# Altium PCB PumpControl.PcbDoc
Units mm, origin at the board's own origin, x right, y up, seen from the top; angles counter-clockwise.
Board outline 52.07 x 92.61 mm, 2 copper layers (Top Layer, Bottom Layer); 86 components, 56 nets, 282 pads, 83 vias.
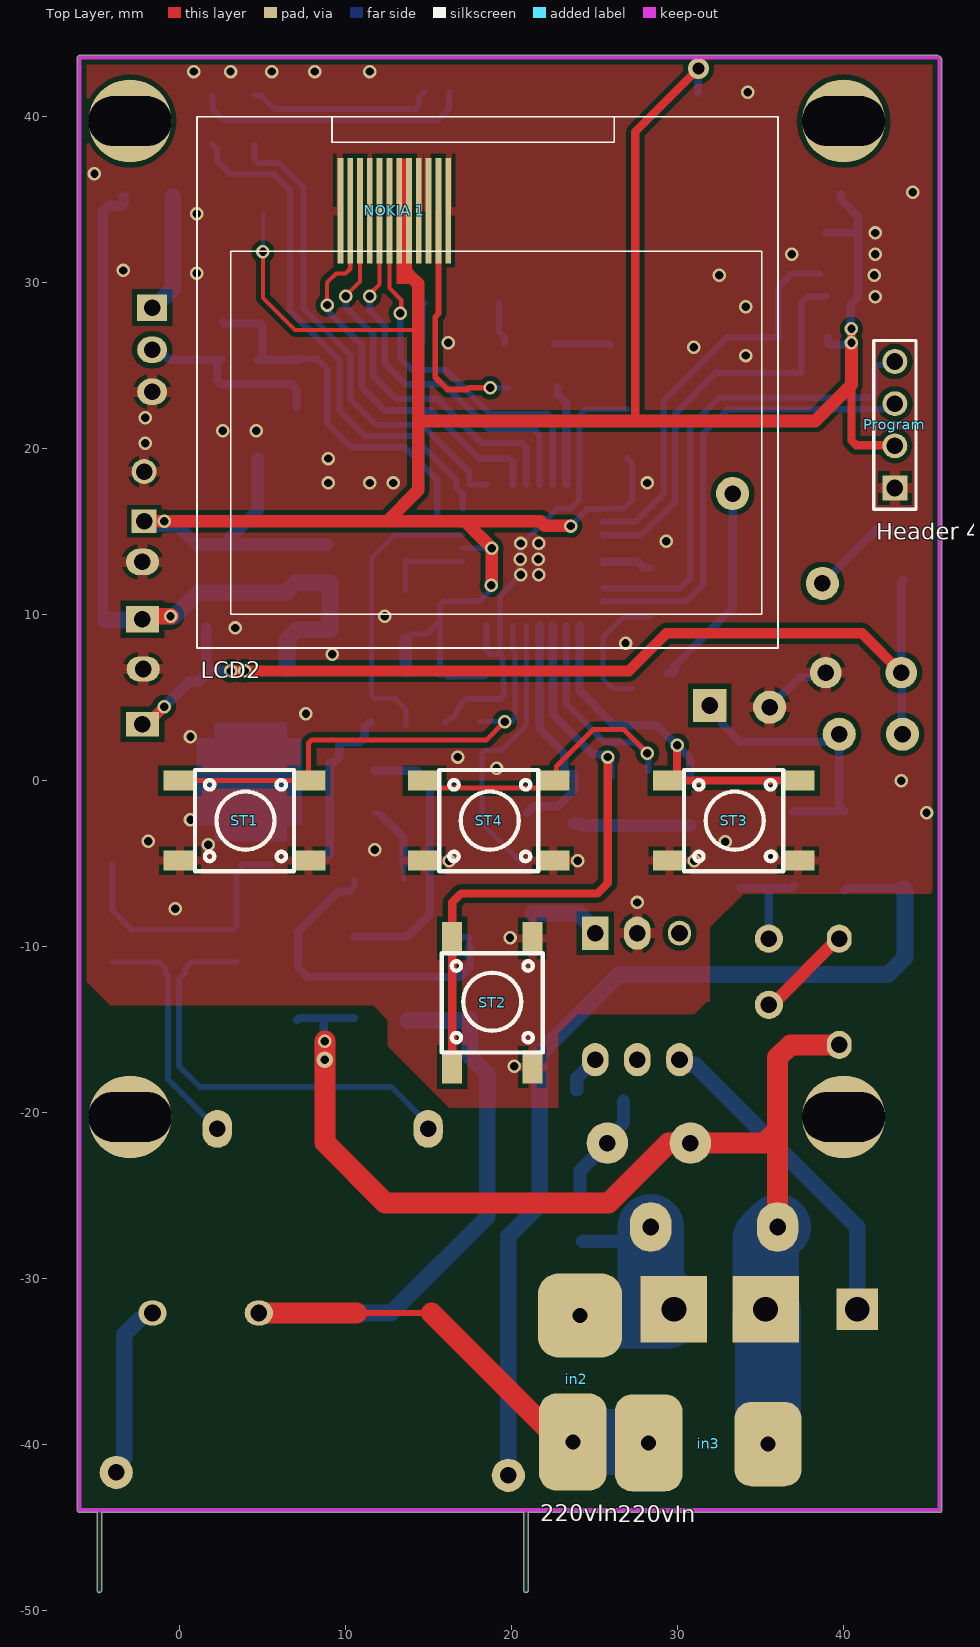
[diagram p0: Top Layer view]
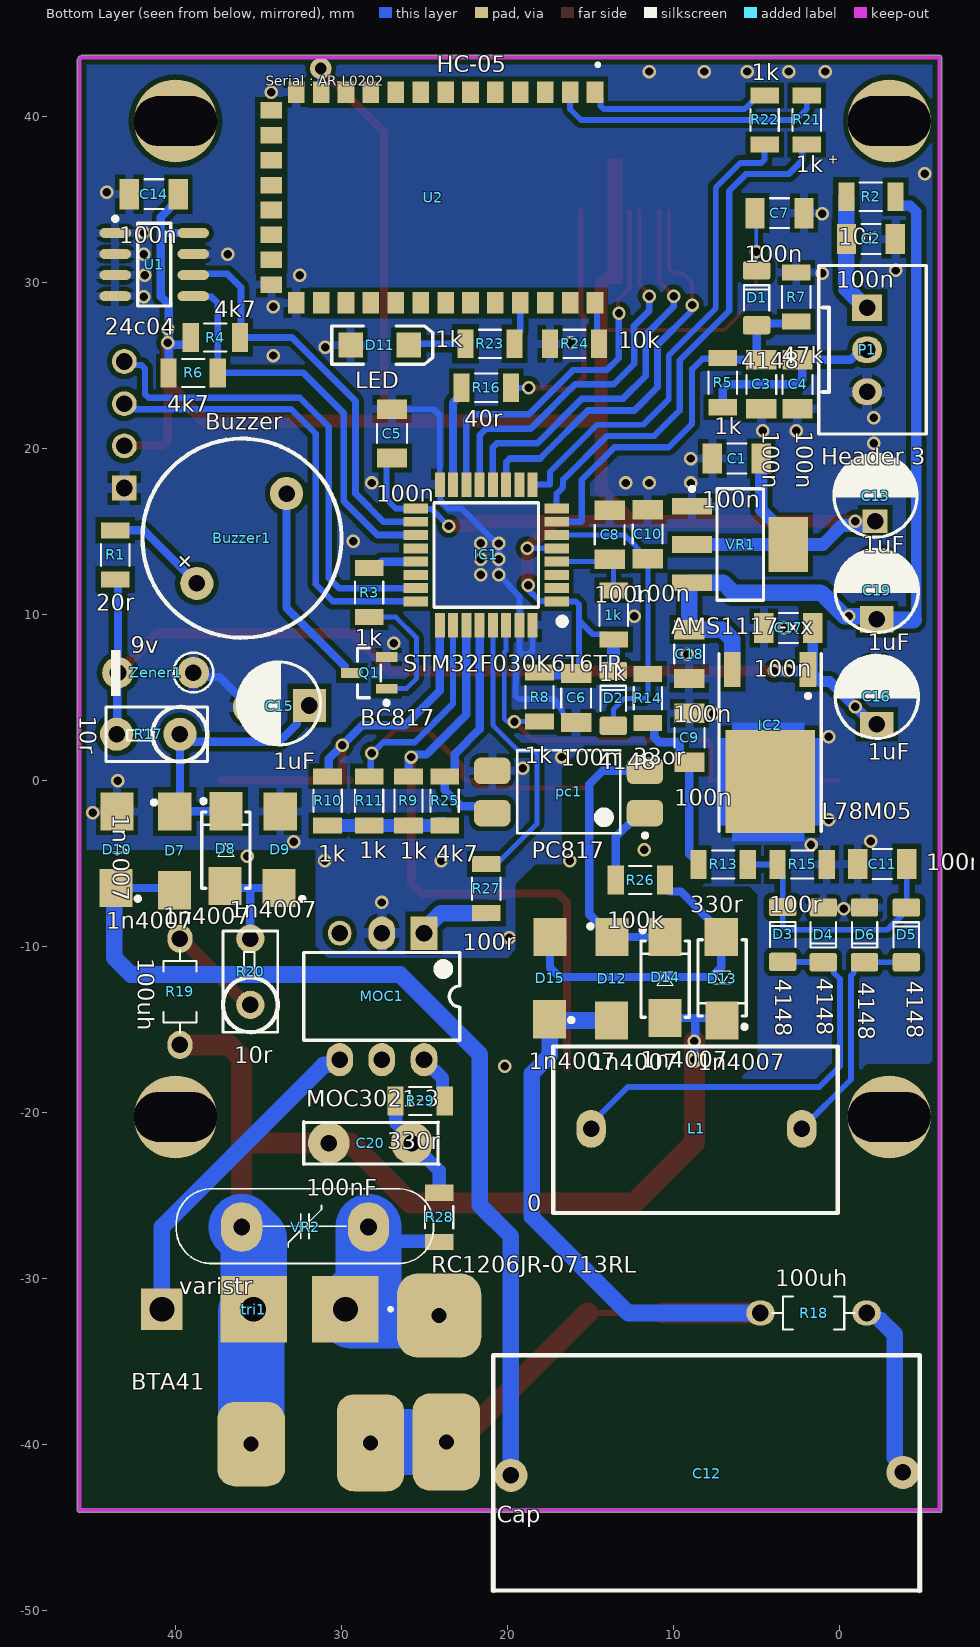
[diagram p1: Bottom Layer view, seen from below]
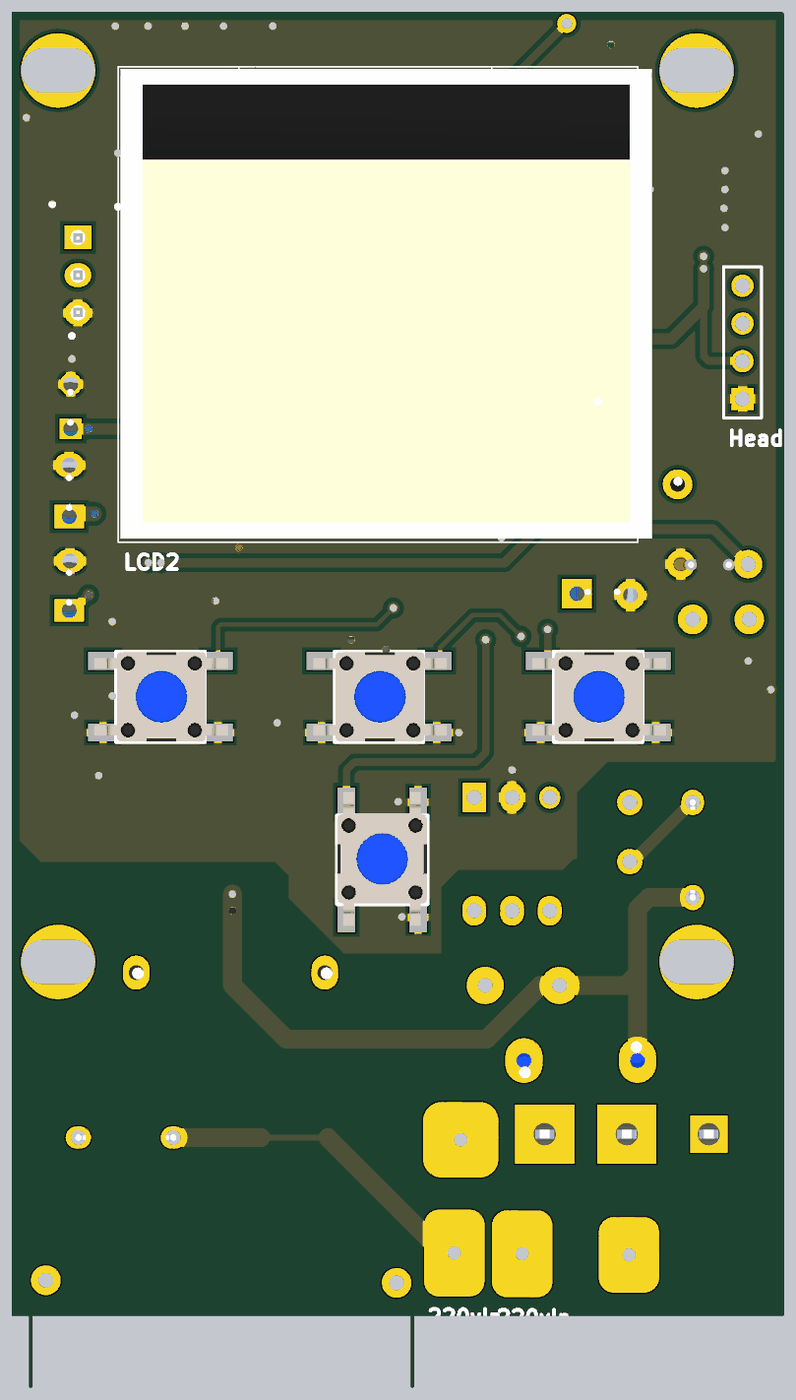
[diagram p2: 3D render of the assembled board from above, using the file's embedded part models]
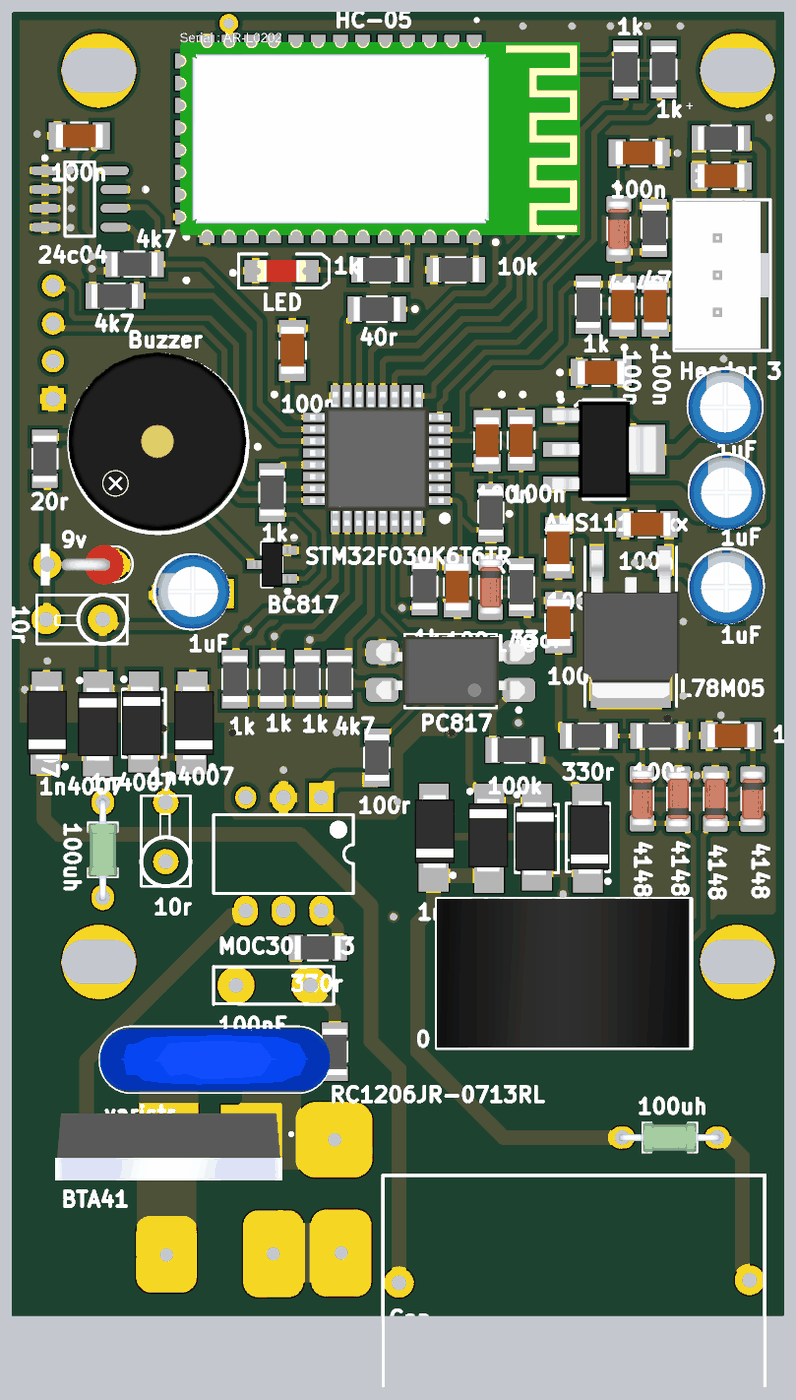
[diagram p3: 3D render of the assembled board from below, using the file's embedded part models]

## Layer stack, top to bottom
Top Solder: solder mask 0.0102, Solder Resist, Dk 3.5
Top Layer: signal copper 0.0356
Dielectric 1: dielectric 0.32, FR-4, Dk 4.8
Bottom Layer: signal copper 0.0356
Bottom Solder: solder mask 0.0102, Solder Resist, Dk 3.5

## Board outline
-4.953,-48.793 -4.953,-44.095 -6.02,-44.095 cw(c-6.02,-43.967) -6.147,-43.967 -6.147,43.561 cw(c-6.02,43.561) -6.02,43.688 45.695,43.688 45.785,43.651 45.886,43.549 45.924,43.459 45.924,-43.967 cw(c45.796,-43.967) 45.796,-44.095 21.006,-44.095 21.006,-48.793 cw(c20.879,-48.793) 20.751,-48.793 20.751,-44.095 -4.699,-44.095 -4.699,-48.793 cw(c-4.826,-48.793)

## Design rules (kind name [scope] priority, off if disabled: settings)
Clearance Clearance_19 [InNamedPolygon('NONET_L-01_P-001') Or InNamedPolygon('NONET_L-01_P-001')] p1: gap=0.305 ignorepadtopadclearanceinfootprint=TRUE
Clearance Clearance_18 [InNamedPolygon('Top Layer-No Net')] p2: gap=0.4 ignorepadtopadclearanceinfootprint=FALSE
Clearance Clearance_17 [InNamedPolygon('Top Layer-No Net')] p3: gap=0.254 ignorepadtopadclearanceinfootprint=FALSE except(0: Arc-Hole Track-Hole SMDPad-Hole THPad-Hole Via-Hole Fill-Hole Poly-Hole Region-Hole Text-Hole)
Clearance Clearance_16 [InNamedPolygon('Top Layer-No Net')] p4: gap=0.4 ignorepadtopadclearanceinfootprint=FALSE
Clearance Clearance_15 [InNamedPolygon('GND_L02_P008')] p5: gap=0.3 ignorepadtopadclearanceinfootprint=TRUE
Clearance Clearance_14 [InNamedPolygon('GND_L01_P006')] p6: gap=0.381 ignorepadtopadclearanceinfootprint=TRUE
Clearance Clearance_13 [InNamedPolygon('GND_L01_P006')] p7: gap=0.381 ignorepadtopadclearanceinfootprint=TRUE
Clearance Clearance_12 [InNamedPolygon('GND_L01_P006')] p8: gap=0.2 ignorepadtopadclearanceinfootprint=FALSE
Clearance Clearance_11 [InNamedPolygon('GND_L01_P006')] p9: gap=0.254 ignorepadtopadclearanceinfootprint=FALSE except(0: Arc-Hole Track-Hole SMDPad-Hole THPad-Hole Via-Hole Fill-Hole Poly-Hole Region-Hole Text-Hole)
Clearance Clearance_10 [InNamedPolygon('GND_L02_P008')] p10: gap=0.5 ignorepadtopadclearanceinfootprint=FALSE
Clearance Clearance_9 [InNamedPolygon('GND_L01_P006')] p11: gap=0.5 ignorepadtopadclearanceinfootprint=FALSE
Clearance Clearance_8 [InNamedPolygon('GND_L01_P006')] p12: gap=0.254 ignorepadtopadclearanceinfootprint=FALSE except(0: Arc-Hole Track-Hole SMDPad-Hole THPad-Hole Via-Hole Fill-Hole Poly-Hole Region-Hole Text-Hole)
Clearance Clearance_7 [InNamedPolygon('GND_L01_P006')] p13: gap=0.5 ignorepadtopadclearanceinfootprint=FALSE
Clearance Clearance_6 [InNamedPolygon('GND_L01_P006')] p14: gap=0.254 ignorepadtopadclearanceinfootprint=FALSE except(0: Arc-Hole Track-Hole SMDPad-Hole THPad-Hole Via-Hole Fill-Hole Poly-Hole Region-Hole Text-Hole)
Clearance 0 [InNamedPolygon('GND_L01_P006')] p15: gap=0.254 ignorepadtopadclearanceinfootprint=FALSE except(0: Arc-Hole Track-Hole SMDPad-Hole THPad-Hole Via-Hole Fill-Hole Poly-Hole Region-Hole Text-Hole)
Clearance Clearance_5 [InNamedPolygon('GND_L01_P006')] p16: gap=0.254 ignorepadtopadclearanceinfootprint=FALSE except(0: Arc-Hole Track-Hole SMDPad-Hole THPad-Hole Via-Hole Fill-Hole Poly-Hole Region-Hole Text-Hole)
Clearance Clearance_4 [InNamedPolygon('GND-E_L02_P002')] p17: gap=0.508 ignorepadtopadclearanceinfootprint=FALSE
Clearance Clearance_3 [InNamedPolygon('GND_L01_P001')] p18: gap=0.635 ignorepadtopadclearanceinfootprint=FALSE
Clearance Clearance_2 [InNamedPolygon('GND_L02_P000')] p19: gap=0.508 ignorepadtopadclearanceinfootprint=FALSE
Clearance Clearance_1 [InNamedPolygon('Bottom Layer-GND')] p20: gap=0.356 ignorepadtopadclearanceinfootprint=FALSE
Clearance [All] p21: gap=0.3 ignorepadtopadclearanceinfootprint=FALSE
PolygonConnect PolygonConnect_15 [All vs IsNamedPolygon('NONET_L-01_P-001') Or IsNamedPolygon('NONET_L-01_P-001')] p1: thpad.connectstyle=Relief thpad.reliefconductorwidth=0.635 thpad.reliefentries=4 thpad.polygonreliefangle="90 Angle" thpad.airgapwidth=0.254 smdpad.connectstyle=Relief smdpad.reliefconductorwidth=0.508 smdpad.reliefentries=4 smdpad.polygonreliefangle="90 Angle" smdpad.airgapwidth=0.254 via.connectstyle=Direct via.reliefconductorwidth=0.254 via.reliefentries=4 via.polygonreliefangle="90 Angle" via.airgapwidth=0.254
PolygonConnect PolygonConnect_14 [All vs IsNamedPolygon('GND_L02_P008')] p2: thpad.connectstyle=Relief thpad.reliefconductorwidth=0.762 thpad.reliefentries=4 thpad.polygonreliefangle="90 Angle" thpad.airgapwidth=0.3 smdpad.connectstyle=Relief smdpad.reliefconductorwidth=0.508 smdpad.reliefentries=4 smdpad.polygonreliefangle="90 Angle" smdpad.airgapwidth=0.3 via.connectstyle=Relief via.reliefconductorwidth=0.254 via.reliefentries=4 via.polygonreliefangle="90 Angle" via.airgapwidth=0.3
PolygonConnect PolygonConnect_13 [All vs IsNamedPolygon('GND_L01_P006')] p3: thpad.connectstyle=Relief thpad.reliefconductorwidth=0.889 thpad.reliefentries=4 thpad.polygonreliefangle="90 Angle" thpad.airgapwidth=0.254 smdpad.connectstyle=Relief smdpad.reliefconductorwidth=0.635 smdpad.reliefentries=4 smdpad.polygonreliefangle="90 Angle" smdpad.airgapwidth=0.254 via.connectstyle=Direct via.reliefconductorwidth=0.254 via.reliefentries=4 via.polygonreliefangle="90 Angle" via.airgapwidth=0.254
PolygonConnect PolygonConnect_12 [All vs IsNamedPolygon('GND_L01_P006')] p4: thpad.connectstyle=Relief thpad.reliefconductorwidth=0.889 thpad.reliefentries=4 thpad.polygonreliefangle="90 Angle" thpad.airgapwidth=0.254 smdpad.connectstyle=Relief smdpad.reliefconductorwidth=0.508 smdpad.reliefentries=4 smdpad.polygonreliefangle="90 Angle" smdpad.airgapwidth=0.254 via.connectstyle=Direct via.reliefconductorwidth=0.254 via.reliefentries=4 via.polygonreliefangle="90 Angle" via.airgapwidth=0.254
PolygonConnect PolygonConnect_11 [All vs IsNamedPolygon('GND_L01_P006')] p5: thpad.connectstyle=Relief thpad.reliefconductorwidth=0.508 thpad.reliefentries=4 thpad.polygonreliefangle="90 Angle" thpad.airgapwidth=0.254 smdpad.connectstyle=Relief smdpad.reliefconductorwidth=0.508 smdpad.reliefentries=4 smdpad.polygonreliefangle="90 Angle" smdpad.airgapwidth=0.254 via.connectstyle=Direct via.reliefconductorwidth=0.254 via.reliefentries=4 via.polygonreliefangle="90 Angle" via.airgapwidth=0.254
PolygonConnect PolygonConnect_10 [All vs IsNamedPolygon('GND_L01_P006')] p6: thpad.connectstyle=Relief thpad.reliefconductorwidth=0.254 thpad.reliefentries=4 thpad.polygonreliefangle="90 Angle" thpad.airgapwidth=0.254 smdpad.connectstyle=Relief smdpad.reliefconductorwidth=0.254 smdpad.reliefentries=4 smdpad.polygonreliefangle="90 Angle" smdpad.airgapwidth=0.254 via.connectstyle=Direct via.reliefconductorwidth=0.254 via.reliefentries=4 via.polygonreliefangle="90 Angle" via.airgapwidth=0.254
PolygonConnect PolygonConnect_9 [All vs IsNamedPolygon('GND_L01_P006')] p7: thpad.connectstyle=Direct thpad.reliefconductorwidth=0.254 thpad.reliefentries=4 thpad.polygonreliefangle="90 Angle" thpad.airgapwidth=0.254 smdpad.connectstyle=Relief smdpad.reliefconductorwidth=0.254 smdpad.reliefentries=4 smdpad.polygonreliefangle="90 Angle" smdpad.airgapwidth=0.254 via.connectstyle=Relief via.reliefconductorwidth=0.254 via.reliefentries=4 via.polygonreliefangle="90 Angle" via.airgapwidth=0.254
PolygonConnect PolygonConnect_8 [All vs IsNamedPolygon('GND_L01_P006')] p8: connectstyle=Relief reliefconductorwidth=0.254 reliefentries=4 polygonreliefangle="90 Angle" airgapwidth=0.254
PolygonConnect PolygonConnect_7 [All vs IsNamedPolygon('GND_L02_P008')] p9: connectstyle=Relief reliefconductorwidth=0.254 reliefentries=4 polygonreliefangle="90 Angle" airgapwidth=0.254
PolygonConnect PolygonConnect_6 [All vs IsNamedPolygon('GND_L02_P008')] p10: connectstyle=Direct reliefconductorwidth=0.254 reliefentries=4 polygonreliefangle="90 Angle" airgapwidth=0.254
PolygonConnect PolygonConnect_5 [All vs IsNamedPolygon('GND_L02_P008')] p11: thpad.connectstyle=Direct thpad.reliefconductorwidth=0.254 thpad.reliefentries=4 thpad.polygonreliefangle="90 Angle" thpad.airgapwidth=0.254 smdpad.connectstyle=Relief smdpad.reliefconductorwidth=0.254 smdpad.reliefentries=4 smdpad.polygonreliefangle="90 Angle" smdpad.airgapwidth=0.254 via.connectstyle=Relief via.reliefconductorwidth=0.254 via.reliefentries=4 via.polygonreliefangle="90 Angle" via.airgapwidth=0.254
PolygonConnect PolygonConnect_4 [All vs IsNamedPolygon('GND-E_L02_P002')] p12: thpad.connectstyle=Relief thpad.reliefconductorwidth=0.635 thpad.reliefentries=4 thpad.polygonreliefangle="90 Angle" thpad.airgapwidth=0.254 smdpad.connectstyle=Relief smdpad.reliefconductorwidth=0.381 smdpad.reliefentries=4 smdpad.polygonreliefangle="90 Angle" smdpad.airgapwidth=0.254 via.connectstyle=Direct via.reliefconductorwidth=0.254 via.reliefentries=4 via.polygonreliefangle="90 Angle" via.airgapwidth=0.254
PolygonConnect PolygonConnect_3 [All vs IsNamedPolygon('GND_L01_P001')] p13: thpad.connectstyle=Relief thpad.reliefconductorwidth=0.635 thpad.reliefentries=4 thpad.polygonreliefangle="90 Angle" thpad.airgapwidth=0.254 smdpad.connectstyle=Relief smdpad.reliefconductorwidth=0.635 smdpad.reliefentries=4 smdpad.polygonreliefangle="90 Angle" smdpad.airgapwidth=0.254 via.connectstyle=Direct via.reliefconductorwidth=0.254 via.reliefentries=4 via.polygonreliefangle="90 Angle" via.airgapwidth=0.254
PolygonConnect PolygonConnect_2 [All vs IsNamedPolygon('GND_L02_P000')] p14: thpad.connectstyle=Relief thpad.reliefconductorwidth=0.635 thpad.reliefentries=4 thpad.polygonreliefangle="90 Angle" thpad.airgapwidth=0.254 smdpad.connectstyle=Relief smdpad.reliefconductorwidth=0.254 smdpad.reliefentries=4 smdpad.polygonreliefangle="90 Angle" smdpad.airgapwidth=0.381 via.connectstyle=Direct via.reliefconductorwidth=0.254 via.reliefentries=4 via.polygonreliefangle="90 Angle" via.airgapwidth=0.254
PolygonConnect PolygonConnect_1 [All vs IsNamedPolygon('Bottom Layer-GND')] p15: thpad.connectstyle=Relief thpad.reliefconductorwidth=0.635 thpad.reliefentries=4 thpad.polygonreliefangle="90 Angle" thpad.airgapwidth=0.254 smdpad.connectstyle=Relief smdpad.reliefconductorwidth=0.381 smdpad.reliefentries=4 smdpad.polygonreliefangle="90 Angle" smdpad.airgapwidth=0.254 via.connectstyle=Direct via.reliefconductorwidth=0.254 via.reliefentries=4 via.polygonreliefangle="90 Angle" via.airgapwidth=0.254
PolygonConnect [All] p16: connectstyle=Direct reliefconductorwidth=0 reliefentries=2 polygonreliefangle="90 Angle" airgapwidth=0
RoomDefinition "LOAD CONTROL_Final2" [InComponentClass('LOAD CONTROL_Final2')] p1: confinementstyle=ConfineIn formatcopy=TRUE lockcomponents=FALSE outline -82.195,-82.989 -31.395,-82.989 -31.395,-57.589 -82.195,-57.589
RoutingVias [All] p1: holewidth=0.5 width=1 viastyle="Through Hole" minholewidth=0.5 minwidth=1 maxholewidth=0.5 maxwidth=1
SolderMaskExpansion [All] p1: expansion=0.102
Width [All] p1: maxlimit=4 minlimit=0.229 preferedwidth=0.5
30 further rules are at their usual default settings.

## Components (designator, comment, footprint, x,y, rotation, side; value= is the part's Value field where it differs from the comment)
1k "1k" RESC3116X65N 13.614,9.982 r270 bottom
Buzzer1 "Buzzer" BUZZER 36.07,14.416 r45 bottom
C1 "100n" CAPC3216X88N 6.198,19.406 r180 bottom
C2 "100n" CAPC3216X88N -1.88,32.639 r180 bottom
C3 "100n" CAPC3216X88N 4.723,23.876 r90 bottom
C4 "100n" CAPC3216X88N 2.54,23.876 r90 bottom
C5 "100n" CAPC3216X88N 26.975,20.904 r270 bottom
C6 "100n" CAPC3216X88N 15.875,4.978 r90 bottom
C7 "100n" CAPC3216X88N 3.632,34.188 r0 bottom
C8 "100n" CAPC3216X88N 13.855,14.811 r270 bottom
C9 "100n" CAPC3216X88N 9.053,2.58 r270 bottom
C10 "100n" CAPC3216X88N 11.57,14.847 r270 bottom
C11 "100n" CAPC3216X88N -2.565,-5.029 r180 bottom
C12 "Cap" RAD-0.3 8.661,-44.475 r0 bottom value=1.5uf
C13 "1uF" "Cap electrolitic radial 5x11-2"#1 -2.159,17.069 r90 bottom
C14 "100n" CAPC3216X88N 41.326,35.331 r180 bottom
C15 "1uF" "Cap electrolitic radial 5x11-2"#2 33.68,4.648 r0 bottom
C16 "1uF" "Cap electrolitic radial 5x11-2"#3 -2.235,4.953 r90 bottom
C17 "100n" CAPC3216X88N 3.094,9.195 r180 bottom
C18 "100n" CAPC3216X88N 9.068,7.62 r90 bottom
C19 "1uF" "Cap electrolitic radial 5x11-2"#4 -2.235,11.328 r90 bottom
C20 "100nF" "Cap 10nF" 25.781,-21.844 r0 bottom
D1 "4148" "SOD80, LL-34" 5.004,29.083 r270 bottom
D2 "4148" "SOD80, LL-34" 13.638,4.953 r270 bottom
D3 "4148" "SOD80, LL-34" 3.429,-9.271 r270 bottom
D4 "4148" "SOD80, LL-34" 0.991,-9.296 r90 bottom
D5 "4148" "SOD80, LL-34" -4.013,-9.296 r270 bottom
D6 "4148" "SOD80, LL-34" -1.499,-9.296 r90 bottom
D7 "1n4007" DIOM4629X24N#1 39.957,-4.267 r90 bottom
D8 "1n4007" DIOM4629X24N#2 36.982,-4.191 r90 bottom
D9 "1n4007" DIOM4629X24N#3 33.73,-4.184 r270 bottom
D10 "1n4007" DIOM4629X24N#4 43.636,-4.166 r270 bottom
D11 "LED" "LED 1206" 27.711,26.238 r180 bottom
D12 "1n4007" DIOM4629X24N#5 13.67,-11.734 r90 bottom
D13 "1n4007" DIOM4629X24N#6 7.087,-11.886 r270 bottom
D14 "1n4007" DIOM4629X24N#7 10.517,-11.962 r90 bottom
D15 "1n4007" DIOM4629X24N#8 17.527,-11.481 r270 bottom
IC1 "STM32F030K6T6TR" QFP80P900X900X160-32N 21.295,13.596 r0 bottom
IC2 "L78M05" TO-252 4.191,3.327 r0 bottom
in2 "220vIn" HDR1X2#1 26.06,-40.513 r0 top
in3 "220vIn" HDR1X2#2 34.722,-40.716 r180 top
L1 "0" ZMC 8.755,-20.98 r180 bottom value=300uH
MOC1 "MOC3021-3" DIP-6 27.584,-13.005 r270 bottom
"NOKIA 1" "LCD2" "LCD NOKIA 1202" 18.732,23.98 r0 top
P1 "Header 3" 3PIN -1.651,25.959 r270 bottom
pc1 "PC817" "SMT Gullwing Lead-Form" 16.332,-0.686 r0 bottom
Program "Header 4" HDR1X4 43.104,17.628 r90 top
Q1 "BC817" SOT23_N 28.352,6.484 r0 bottom
R1 "20r" RESC3116X65N 43.65,13.596 r90 bottom
R2 "10r" RESC3116X65N -1.88,35.179 r0 bottom
R3 "1k" RESC3116X65N 28.352,11.328 r270 bottom
R4 "4k7" RESC3116X65N 37.617,26.694 r180 bottom
R5 "1k" RESC3116X65N 7.047,23.975 r90 bottom
R6 "4k7" RESC3116X65N 38.95,24.562 r180 bottom
R7 "47k" RESC3116X65N 2.616,29.134 r270 bottom
R8 "1k" RESC3116X65N 18.085,5.029 r90 bottom
R9 "1k" RESC3116X65N 25.984,-1.222 r270 bottom
R10 "1k" RESC3116X65N 30.854,-1.222 r270 bottom
R11 "1k" RESC3116X65N 28.352,-1.222 r270 bottom
R13 "330r" RESC3116X65N 7.017,-5.055 r180 bottom
R14 "33or" RESC3116X65N 11.557,4.953 r270 bottom
R15 "100r" RESC3116X65N 2.261,-5.055 r0 bottom
R16 "40r" RESC3116X65N 21.295,23.672 r180 bottom
R17 "10r" RES-(1/2)-Stand#1 39.751,2.794 r0 bottom
R18 "100uh" RESAD640W45L370D200 1.575,-32.08 r180 bottom
R19 "100uh" RESAD640W45L370D200 39.751,-12.725 r90 bottom
R20 "10r" RES-(1/2)-Stand#2 35.509,-13.513 r90 bottom
R21 "1k" RESC3116X65N 1.981,39.802 r270 bottom
R22 "1k" RESC3116X65N 4.521,39.802 r270 bottom
R23 "1k" RESC3116X65N 21.07,26.314 r180 bottom
R24 "10k" RESC3116X65N 15.977,26.314 r180 bottom
R25 "4k7" RESC3116X65N 23.8,-1.222 r270 bottom
R26 "100k" RESC3116X65N 12.014,-5.994 r180 bottom
R27 "100r" RESC3116X65N 21.295,-6.509 r90 bottom
R28 "RC1206JR-0713RL" RESC3116X65N 24.13,-26.314 r270 bottom
R29 "330r" RESC3116X65N 25.273,-19.304 r180 bottom
ST1 "SW-PB" "PUSH BOTTOM 6*6" 3.974,-2.286 r90 top
ST2 "SW-PB" "PUSH BOTTOM 6*6" 18.716,-13.327 r180 top
ST3 "SW-PB" "PUSH BOTTOM 6*6" 33.451,-2.286 r90 top
ST4 "SW-PB" "PUSH BOTTOM 6*6" 18.694,-2.286 r90 top
tri1 "BTA41" TO552P1530X450X2110-3B 35.311,-31.852 r0 bottom
U1 "24c04" SO8_L 41.3,31.09 r180 bottom
U2 "HC-05" XCVR_HC-05 21.07,35.128 r270 bottom
VR1 "AMS1117-xx" SOT-223 5.994,14.224 r0 bottom
VR2 "varistr" "14D XXX" 32.225,-26.848 r180 bottom value=xxDxxx
Zener1 "9v" "Diode 1W_Stand" 40.919,6.484 r0 bottom

## Footprints (in the part's own frame and the unit in brackets; to place one, negate y for a bottom-side part, rotate by r counter-clockwise, add the part's x,y. Pads: shape width x height; smd on the part's side, far side on the other; paste and mask are expansions set on the pad)
3PIN [mm]
  rect 1.6x1.8 hole 1: 1(-2.54,0)
  oval 1.6x1.8 hole 1: 2(0,0) 3(2.54,0)
  silkscreen extent -5.08,-2.92 5.08,3.56, body extent -4.95,-2.9 4.95,3.49, height 7
"14D XXX" [mm] "MOV-14DxxxK Metal Oxide Varistors (MOVs) are 14 mm-Design:Abbas Basereh"
  oval 2.5x3 hole 1: 1(3.836,-0.051) 2(-3.81,-0.051)
  silkscreen extent -7.75,-2.25 7.75,2.25, body extent -7.73,-2.1 7.77,2.1, height 19.5
BUZZER [mm]
  round 2 hole 1: 1(0.092,3.675) 2(0.092,-3.975)
  silkscreen extent -5.91,-6.17 6.09,5.82, body extent -5.75,-6.25 6.25,5.75, height 9.5
"Cap 10nF" [mm]
  round 2.5 hole 1: 1(0,0) 2(5,0)
  silkscreen extent -1.62,-1.28 6.51,1.29
"Cap electrolitic radial 5x11-2"#1 [mm] "Cap electrolitic radial 5x11-2-Design:Abbas Basereh"
  rect 1.4x1.5 hole 1: 1(-1.448,0.025)
  round 1.5 hole 1: 2(1.549,0.025)
  silkscreen extent -2.4,-2.5 2.6,2.5, body extent -2.5,-2.5 2.5,2.5, height 11.3
"Cap electrolitic radial 5x11-2"#2 [mm] "Cap electrolitic radial 5x11-2-Design:Abbas Basereh"
  rect 2x2 hole 1: 1(-1.727,0.127)
  round 2 hole 1: 2(1.88,0.229)
  silkscreen extent -2.4,-2.5 2.6,2.5, body extent -2.5,-2.5 2.5,2.5, height 11.3
"Cap electrolitic radial 5x11-2"#3 [mm] "Cap electrolitic radial 5x11-2-Design:Abbas Basereh"
  rect 1.5x2 hole 1: 1(-1.559,0)
  oval 1.5x2 hole 1: 2(1.769,0.051)
  silkscreen extent -2.4,-2.5 2.6,2.5, body extent -2.5,-2.5 2.5,2.5, height 11.3
"Cap electrolitic radial 5x11-2"#4 [mm] "Cap electrolitic radial 5x11-2-Design:Abbas Basereh"
  rect 1.6x2 hole 1: 1(-1.61,0)
  oval 1.6x2 hole 1: 2(1.845,0)
  silkscreen extent -2.4,-2.5 2.6,2.5, body extent -2.5,-2.5 2.5,2.5, height 11.3
CAPC3216X88N [mm]
  rect 1.16x1.82 smd: 1(-1.475,0) 2(1.475,0)
  silkscreen extent -0.57,-0.9 0.57,0.9, body extent -1.6,-0.8 1.6,0.8, height 0.88
"Diode 1W_Stand" [mil]
  round 75 hole 39.37: 1(-78,-1) 2(101,-1)
  silkscreen extent -125,-55 118,55, body extent -103,-52 65,53, height 291
DIOM4629X24N#1 [mm] "Molded Diode, 2-Leads, Body 4/60x2/90mm, IPC Medium Density-Design:Abbas Basereh"
  rect 2.3x2 smd: 1(-2.337,0.127) 2(2.413,0.102)
  silkscreen extent 2.83,1.23 3.07,1.48, body extent -2.5,-1.22 2.5,1.48, height 2.2
DIOM4629X24N#2 [mm] "Molded Diode, 2-Leads, Body 4/60x2/90mm, IPC Medium Density-Design:Abbas Basereh"
  rect 2.3x2 smd: 1(-2.152,0.05) 2(2.344,-0.001)
  silkscreen extent -2.3,-1.45 3.07,1.48, body extent -2.5,-1.22 2.5,1.48, height 2.2
DIOM4629X24N#3 [mm] "Molded Diode, 2-Leads, Body 4/60x2/90mm, IPC Medium Density-Design:Abbas Basereh"
  rect 2.3x2 smd: 1(-2.33,0.025) 2(2.286,-0.051)
  silkscreen extent 2.83,1.22 3.07,1.47, body extent -2.5,-1.22 2.5,1.48, height 2.2
DIOM4629X24N#4 [mm] "Molded Diode, 2-Leads, Body 4/60x2/90mm, IPC Medium Density-Design:Abbas Basereh"
  rect 2.3x2 smd: 1(-2.297,0.102) 2(2.311,0.025)
  silkscreen extent 2.83,1.22 3.07,1.47, body extent -2.5,-1.22 2.5,1.48, height 2.2
DIOM4629X24N#5 [mm] "Molded Diode, 2-Leads, Body 4/60x2/90mm, IPC Medium Density-Design:Abbas Basereh"
  rect 2.3x2 smd: 1(-2.722,0.076) 2(2.311,0.051)
  silkscreen extent 2.83,1.23 3.07,1.48, body extent -2.5,-1.22 2.5,1.48, height 2.2
DIOM4629X24N#6 [mm] "Molded Diode, 2-Leads, Body 4/60x2/90mm, IPC Medium Density-Design:Abbas Basereh"
  rect 2.3x2 smd: 1(-2.464,-0.051) 2(2.565,0)
  silkscreen extent -2.3,-1.45 3.07,1.47, body extent -2.5,-1.22 2.5,1.48, height 2.2
DIOM4629X24N#7 [mm] "Molded Diode, 2-Leads, Body 4/60x2/90mm, IPC Medium Density-Design:Abbas Basereh"
  rect 2.3x2 smd: 1(-2.337,0) 2(2.54,0)
  silkscreen extent -2.3,-1.45 3.07,1.48, body extent -2.5,-1.22 2.5,1.48, height 2.2
DIOM4629X24N#8 [mm] "Molded Diode, 2-Leads, Body 4/60x2/90mm, IPC Medium Density-Design:Abbas Basereh"
  rect 2.3x2 smd: 1(-2.058,0.076) 2(2.896,0.051)
  silkscreen extent 2.83,1.22 3.07,1.47, body extent -2.5,-1.22 2.5,1.48, height 2.2
DIP-6 [mm] "DIP; 6 Leads; Row Spacing 7.62 mm; Pitch 2.54 mm"
  rect 2x1.6 hole 1: 1(-3.81,2.54)
  oval 2x1.6 hole 1: 2(-3.81,0) 4(3.81,-2.54) 5(3.81,0) 6(3.81,2.54)
  oval 1.5x1.4 hole 1: 3(-3.81,-2.54)
  silkscreen extent -2.65,-4.7 2.65,4.7
HDR1X2#1 [mil] "Connector; Header; 2 Position"
  rrect50% 160x230 hole 35.43: 1(-93,26)
  rrect50% 200x200 hole 35.43: 2(-76,326)
HDR1X2#2 [mil] "Connector; Header; 2 Position"
  rrect50% 160x200 hole 35.43: 1(-29,-29)
  rrect50% 160x230 hole 35.43: 2(254,-32)
HDR1X4 [mm] "Connector; Header; 4 Position"
  rect 1.5x1.5 hole 1: 1(0,0)
  round 1.5 hole 1: 2(2.54,0) 3(5.08,0) 4(7.62,0)
  silkscreen extent -1.27,-1.27 8.89,1.27
"LCD NOKIA 1202" [mm]
  rect 0.35x6.35 smd: 1(-9.039,10.344) 2(-8.448,10.344) 3(-7.857,10.344) 4(-7.267,10.344) 5(-6.676,10.344) 6(-6.085,10.344) 7(-5.494,10.344) 8(-4.903,10.344) 9(-4.312,10.344) 10(-3.721,10.344) 11(-3.13,10.344) 12(-2.539,10.344)
  silkscreen extent -17.68,-15.99 17.32,16.01, body extent -17.52,-15.75 18.28,15.85, height 2.51
"LED 1206" [mm]
  rect 1.5x1.5 smd: 1(-1.75,0) 2(1.75,0)
  silkscreen extent -2.9,-1.15 3.2,1.15, body extent -1.65,-0.72 1.65,0.73, height 1.36
"PUSH BOTTOM 6*6" [mm]
  rect 1.2x2 smd: 1(-2.54,3.937) 1(-2.54,-3.81) 2(2.286,-3.81) 2(2.286,3.937)
  silkscreen extent -3.18,-2.92 2.92,3.05, body extent -3.13,-4.5 2.87,4.5, height 4.2
QFP80P900X900X160-32N [mm] "Integrated Circuit"
  rect 1.475x0.6 smd: 1(-4.238,2.8) 2(-4.238,2) 3(-4.238,1.2) 4(-4.238,0.4) 5(-4.238,-0.4) 6(-4.238,-1.2) 7(-4.238,-2) 8(-4.238,-2.8) 17(4.238,-2.8) 18(4.238,-2) 19(4.238,-1.2) 20(4.238,-0.4) 21(4.238,0.4) 22(4.238,1.2) 23(4.238,2) 24(4.238,2.8)
  rect 0.6x1.475 smd: 9(-2.8,-4.238) 10(-2,-4.238) 11(-1.2,-4.238) 12(-0.4,-4.238) 13(0.4,-4.238) 14(1.2,-4.238) 15(2,-4.238) 16(2.8,-4.238) 25(2.8,4.238) 26(2,4.238) 27(1.2,4.238) 28(0.4,4.238) 29(-0.4,4.238) 30(-1.2,4.238) 31(-2,4.238) 32(-2.8,4.238)
  silkscreen extent -4.77,-3.15 3.15,4.2, body extent -4.5,-4.5 4.5,4.5, height 1.6
RAD-0.3 [mm] "Radial Cap, Thru-Hole; 2 Leads; 0.3 in Pin Spacing"
  round 2 hole 1: 1(-12.471,-2.794) 2(11.151,-2.616)
RES-(1/2)-Stand#1 [mm]
  round 2 hole 1: 1(0,0) 2(3.81,0)
  silkscreen extent -1.65,-1.65 4.44,1.65, body extent -1.68,-1.67 4.14,1.67, height 11
RES-(1/2)-Stand#2 [mm]
  round 1.7 hole 1: 1(0,0) 2(3.988,0)
  silkscreen extent -1.65,-1.65 4.44,1.65, body extent -1.68,-1.67 4.14,1.67, height 11
RESAD640W45L370D200 [mm]
  oval 1.7x1.5 hole 1: 1(-3.2,0) 2(3.2,0)
  silkscreen extent -2.47,-1 2.47,1, body extent -3.42,-1 3.42,1, height 2
RESC3116X65N [mm]
  rect 0.97x1.73 smd: 1(-1.48,0) 2(1.48,0)
  silkscreen extent -0.67,-0.85 0.67,0.85, body extent -1.55,-0.8 1.55,0.8, height 0.65
"SMT Gullwing Lead-Form" [mm] "SOP, 4-Leads, Body 4/65x6/75mm, Pitch 2/54mm, IPC Medium Density designer:abbas basereh"
  rrect50% 2.2x1.6 smd mask+0.06: 1(-4.6,1.27) 2(-4.6,-1.27) 3(4.6,-1.27) 4(4.6,1.27)
  silkscreen extent -4.72,-2.5 3.1,2.74, body extent -5,-2.29 5,2.29, height 3.89
SO8_L [mm] "SOIC, 8-Leads, Body 4.9x3.9mm, Pitch 1.27mm, IPC High Density"
  oval 1.9x0.6 smd: 1(-2.35,1.905) 2(-2.35,0.635) 3(-2.35,-0.635) 4(-2.35,-1.905) 5(2.35,-1.905) 6(2.35,-0.635) 7(2.35,0.635) 8(2.35,1.905)
  silkscreen extent -2.47,-2.5 1,2.88, body extent -2,-2.5 2,2.5, height 1.75
"SOD80, LL-34" [mm] "Diode, MiniMELF"
  round 0.5 on Mech15: 0(0,0)
  rrect25% 1.1x1.65 smd: 1(1.65,0) 2(-1.65,0)
  silkscreen extent -0.76,-0.76 0.76,0.76, body extent -1.88,-0.8 1.82,0.8, height 1.6
SOT23_N [mm] "SOT23, 3-Leads, Body 2.9x1.3mm, Pitch 0.95mm, Lead Span 2.3mm, IPC Medium Density"
  rect 1.3x0.6 smd: 1(-1.05,0.95) 2(-1.05,-0.95) 3(1.05,0)
  silkscreen extent -1.17,-1.5 0.7,1.92, body extent -1.27,-1.5 1.27,1.5, height 1.1
SOT-223 [mm]
  rect 2.4x1 smd: 1(2.9,-2.3) 2(2.9,0) 3(2.9,2.3)
  rect 2.4x3.3 smd: 4(-2.9,0)
  silkscreen extent -1.4,-3.47 3.03,3.35, body extent -3.49,-3.24 3.49,3.24, height 1.64
TO552P1530X450X2110-3B [mm]
  rect 4x4 hole 1.5: 1(-5.525,0) 2(0,0)
  rect 2.5x2.5 hole 1.5: 3(5.525,0)
  silkscreen extent -8.35,-0.1 -8.15,0.1, body extent -7.65,-1.4 7.65,3.1, height 21.1
TO-252 [mm] "D-PAK/TO-252-AA; 3 Leads (1 Cropped); Body 10.1 (inc. leads) x 6.6 mm (LxW max)"
  rect 1x2.1 smd: 1(-2.285,-3.375) 3(2.285,-3.375)
  rect 5.4x6.2 smd: 4(0,3.375)
  silkscreen extent -3.08,-4.32 3.09,6.38, body extent -3.27,-4.11 3.27,5.83, height 2.39
XCVR_HC-05 [mm]
  rect 1.3x1 smd: 1(-6.35,6.325) 2(-6.35,4.825) 3(-6.35,3.325) 4(-6.35,1.825) 5(-6.35,0.325) 6(-6.35,-1.175) 7(-6.35,-2.675) 8(-6.35,-4.175) 9(-6.35,-5.675) 10(-6.35,-7.175) 11(-6.35,-8.675) 12(-6.35,-10.175) 13(-6.35,-11.675) 22(6.35,-11.675) 23(6.35,-10.175) 24(6.35,-8.675) 25(6.35,-7.175) 26(6.35,-5.675) 27(6.35,-4.175) 28(6.35,-2.675) 29(6.35,-1.175) 30(6.35,0.325) 31(6.35,1.825) 32(6.35,3.325) 33(6.35,4.825) 34(6.35,6.325)
  rect 1x1.3 smd: 14(-5.25,-13.175) 15(-3.75,-13.175) 16(-2.25,-13.175) 17(-0.75,-13.175) 18(0.75,-13.175) 19(2.25,-13.175) 20(3.75,-13.175) 21(5.25,-13.175)
  silkscreen extent -8.1,6.4 -7.9,6.6, body extent -6.5,-13.45 6.5,13.45, height 2.2
ZMC [mil]
  oval 70x90 hole 39.37: 1(-245,0) 2(255,0)
  silkscreen extent -335,-200 340,195, body extent -334,-199 335,199, height 53

## Part data
1k R1 R2 R3 R4 R5 R6 R7 R8 R9 R10 R11 R13 R14 R15 R16 R21 R22 R23 R24 R25 R26 R27 R29: library part RC1206JR-0713RL, "13 Ohms ±5% 0.25W, 1/4W Chip Resistor 1206 (3216 Metric) Moisture Resistant Thick Film", Package="3116 Yageo", Availability="In Stock", Check_prices=https://www.snapeda.com/parts/RC1206JR-0713RL/Yageo/view-part/?ref=eda, MF=Yageo, MP=RC1206JR-0713RL, Price=None, Purchase-URL=https://pricing.snapeda.com/search/part/RC1206JR-0713RL/?ref=eda, SnapEDA_Link=https://www.snapeda.com/parts/RC1206JR-0713RL/Yageo/view-part/?ref=snap
C1 C2 C3 C4 C5 C6 C7 C8 C9 C10 C11 C14 C17 C18: library part C1206C120J5GACTU, "1206 C 12pF Ceramic Multilayer Capacitor, 50 VDC, +125degC, C0G Dielec, +/-5%", Package="3216 KEMET", Check_prices=https://www.snapeda.com/parts/C1206C120J5GACTU/KEMET/view-part/?ref=eda, MF=KEMET, MP=C1206C120J5GACTU, SnapEDA_Link=https://www.snapeda.com/parts/C1206C120J5GACTU/KEMET/view-part/?ref=snap
C12: "Capacitor", LatestRevisionDate=17-Jul-2002, LatestRevisionNote="Re-released for DXP Platform.", PackageDescription="Radial Cap, Thru-Hole; 2 Leads; 0.3 in Pin Spacing", PackageReference=RAD-0.3, Published=8-Jun-2000, Publisher="Altium Limited"
C13 C15 C16 C19: library part "Cap ELECTROLITIC TOTAL SIZE", "Cap electrolitic radial", Data=16-12-2016, Designer="Abbas Basereh"
C20: library part Cap-Bipolar, "Bipolar Capacitor", Voltage=100V, Adding Date=1387/12/20, Designer="Saeid Jorablo", Organazation=ControTec
D1 D2 D3 D4 D5 D6: library part 1N4148UR-1, "DIODE GEN PURP 75V 200MA DO213AA", ComponentLink1Description="Manufacturer Link", ComponentLink1URL=http://www.digikey.com/product-detail/en/microsemi-corporation/1N4148UR-1/1N4148UR-1-ND/4377991, ComponentLink2Description=Datasheet, PackageDescription="DIODE GEN PURP 75V 200MA DO213AA", PackageReference=DO-213AA&SOD-80, PackageVersion=2017-1-12, PART.NO=1N4148UR-1, Published=2017-1-12, Publisher="Abbas Basereh"
D7 D8 D9 D10 D12 D13 D14 D15: library part "1n4007 SMD M7", "Standard Rectifiers", Manufacturer="DC COMPONENTS", Data=16-12-2016, Designer="Abbas Basereh", Link=http://www.tme.eu/en/details/m7/smd-universal-diodes/dc-components/, Part. No=M7
D11: library part "LED SMD 1206", "SMD 1206 LED"
IC1: "Integrated Circuit", Manufacturer_Name=STMicroelectronics, Mouser Part Number=511-STM32F030K6T6TR, Arrow Part Number=STM32F030K6T6TR, Arrow Price/Stock=https://www.arrow.com/en/products/stm32f030k6t6tr/stmicroelectronics, Datasheet Link=http://www.st.com/content/ccc/resource/technical/document/datasheet/a4/5d/0b/0e/87/c4/4d/71/DM00088500.pdf/files/DM00088500.pdf/jcr:content/translations/en.DM00088500.pdf, Height=1.6mm, Manufacturer_Part_Number=STM32F030K6T6TR, Mouser Price/Stock=https://www.mouser.co.uk/ProductDetail/STMicroelectronics/STM32F030K6T6TR/?qs=9MuLHSklicort60U4QZudQ%3D%3D
IC2: "Precision 500mA Regulator"
in2 in3: library part "Header 2", "Header, 2-Pin", LatestRevisionDate=17-Jul-2002, LatestRevisionNote="Re-released for DXP Platform.", Publisher="Altium Limited"
L1: library part Inductor, "Inductor", Code_IEC=1005, Code_JEITA=0402, LatestRevisionDate=29-May-2009, LatestRevisionNote="IPC-7351 Footprint Added.", PackageDescription="Chip Inductor", PackageReference=0402-A, Published=8-Jun-2000, Publisher="Altium Limited"
MOC1: "Opto-Triac", Designer="Seyed Mohsen Ghasemian", E-mail=picpars@gmail.com, LatestRevisionDate=17-11-2011, Published=17-11-2011, Publisher=www.picpars.com, WEB=www.picpars.com
"NOKIA 1": library part "NOKIA 1202"
P1: "Header, 3-Pin", LatestRevisionDate=17-Jul-2002, LatestRevisionNote="Re-released for DXP Platform.", Publisher="Altium Limited"
pc1: library part PC817XI, "DIP 4pin General Purpose  Photocoupler", ComponentLink1Description="Manufacturer Link", ComponentLink1URL=http://www.roboeq.ir/files/id/233/name/PC817.pdf/, ComponentLink2Description="DIP 4pin General Purpose", DatasheetVersion=2017-2-27, PackageDescription="SOP, 4-Leads, Body 4/65x6/75mm, Pitch 2/54mm, IPC Medium Density designer:abbas basereh", PackageReference="SMT Gullwing Lead-Form", PackageVersion=2017-2-27, Published=2017-2-27, Publisher="Abbas Basereh"
Program: "Header, 4-Pin", LatestRevisionDate=17-Jul-2002, LatestRevisionNote="Re-released for DXP Platform.", Publisher="Altium Limited"
Q1: "45 V, 500 mA NPN general-purpose transistors", ComponentLink1Description="Manufacturer Link", ComponentLink1URL=http://www.nxp.com/, ComponentLink2Description=Datasheet, ComponentLink2URL=http://www.nxp.com/, DatasheetVersion=2017, LatestRevisionDate=2017, LatestRevisionNote="IPC-7351 Footprint Added.", PackageDescription="3-Pin SOT-23 Package 0.95 mm Pitch, 2.3 mm Lead Span", PackageReference=SOT23, PackageVersion=2017-2-8, Published=2017-2-8, Publisher="Abbas Basereh"
R17 R20: library part "RES DIP PACKAGE", "TOTAL DIP RESISTOR PACK", Designer="Ali Hafizi"
R18 R19: library part LR0204F13K3, "13.3 kOhms ±1% 0.25W, 1/4W Through Hole Resistor Axial - Metal Film", Package="Axial TE Connectivity Passive Product", Check_prices=https://www.snapeda.com/parts/LR0204F13K3/TE/view-part/?ref=eda, MF="TE Connectivity Passive Product", MP=LR0204F13K3, SnapEDA_Link=https://www.snapeda.com/parts/LR0204F13K3/TE/view-part/?ref=snap
R28: "13 Ohms ±5% 0.25W, 1/4W Chip Resistor 1206 (3216 Metric) Moisture Resistant Thick Film", Package="3116 Yageo", Availability="In Stock", Check_prices=https://www.snapeda.com/parts/RC1206JR-0713RL/Yageo/view-part/?ref=eda, MF=Yageo, MP=RC1206JR-0713RL, Price=None, Purchase-URL=https://pricing.snapeda.com/search/part/RC1206JR-0713RL/?ref=eda, SnapEDA_Link=https://www.snapeda.com/parts/RC1206JR-0713RL/Yageo/view-part/?ref=snap
ST1 ST2 ST3 ST4: "Switch", LatestRevisionDate=17-Jul-2002, LatestRevisionNote="Re-released for DXP Platform.", PackageDescription="Switch; 2 Leads", PackageReference=SPST-2, Published=24-Mar-1999, Publisher="Altium Limited"
tri1: library part BTA41-600A, "Thyristors, Discretes (diodes, transistors, thyristors ...), Semiconductors and Actives, original, triac, thyristors", Package="TOP-3 STMicroelectronics", Check_prices=https://www.snapeda.com/parts/BTA41-600A/STMicroelectronics/view-part/?ref=eda, MF=STMicroelectronics, MP=BTA41-600A, SnapEDA_Link=https://www.snapeda.com/parts/BTA41-600A/STMicroelectronics/view-part/?ref=snap
U1: library part AT24C512, "EEPROM"
U2: "Bluetooth to Serial Port Module", Package="Module ITead Studio", Check_prices=https://www.snapeda.com/parts/HC-05/ITEAD/view-part/?ref=eda, MF="ITead Studio", MP=HC-05, SnapEDA_Link=https://www.snapeda.com/parts/HC-05/ITEAD/view-part/?ref=snap
VR1: library part AMS1117
VR2: library part "VARISTOR (VDR)", "VARISTORS", Manufacturer=china-canada-philipina, Data=2017-1-5, Designer="Abbas Basereh", Link=digikey.com, Models=MOV-VDR-COV, Publisher="ABBAS BASEREH"
Zener1: library part "Diode Zener", "Zener Diode", Voltage="3.3 V", Company=E.P.I.L, Design Date=2011/11/02, Designer="Saeid Jorablo"
Buzzer1: ComponentLinkURL=www.picpars.com, Designer="Seyed Mohsen Ghasemain"

## Free pads (board coordinates)
  round 5 hole 3 slot 5 at 0 deg: ""(-2.984,-20.265) ""(-2.984,39.735) ""(40.016,-20.265) ""(40.016,39.735)

## Via types
v1: diameter 0.813, hole 0.508, Top Layer to Bottom Layer, tented both sides, 81 vias
v2: diameter 1, hole 0.5, Top Layer to Bottom Layer, tented both sides, 1 vias
v3: diameter 1.27, hole 0.711, Top Layer to Bottom Layer, 1 vias

## Nets (pads, with @x,y where several pads share a name; then routed paths per layer and width w, separated by ;. In a path a pad name is that pad's centre, name@x,y a point inside that pad or via, vN(x,y) a via of type N, cw(c..) or ccw(c..) an arc to the next point about the centre after c; other vN are vias at no path point)
9v: C16.1 C17.2 IC2.1 R1.1 R17.2 Zener1.2 | length 63.4
  Top Layer w0.635: C16.1 -1.985,3.394 v1(-0.93,4.449) ; v1(3.094,6.603) v1(3.937,6.603) 27.075,6.603 29.337,8.865 41.129,8.865 Zener1.2
  Bottom Layer w0.5: R17.2 43.523,2.832 43.523,6.471 Zener1.2 43.485,11.95 R1.1
  Bottom Layer w0.635: C16.1 -1.985,3.394 0.59,5.97 1.157,5.97 1.619,6.432 C17.2 ; IC2.1 2.005,6.603 v1(3.094,6.603) v1(3.937,6.603)
adc3.4: IC1.10
amper: C10.2 D2.1 IC1.6 R14.1 | length 17.8
  Bottom Layer w0.3: D2.1 13.638,4.278 12.963,4.953 11.733,4.953 11.557,5.129 R14.1 11.557,13.39 12.963,14.796 IC1.6
backlight: IC1.15 R16.1 | length 6.1
  Bottom Layer w0.5: R16.1 22.775,23.292 23.295,22.772 IC1.15
buzzer: IC1.21 R3.1 | length 3
  Bottom Layer w0.508: IC1.21 27.585,13.196 27.972,12.808 R3.1
GND: "NOKIA 1.1" "NOKIA 1.4" "NOKIA 1.9" "NOKIA 1.10" "NOKIA 1.12" C1.1 C2.2 C3.1 C4.1 C5.1 C6.1 C7.1 C8.1 C9.1 C10.1 C11.1 C13.2 C14.1 C15.2 C16.2 C17.1 C18.1 C19.2 D4.1 D6.1 D9.1 D10.1 D11.1 IC1.16 IC1.31 IC1.32 IC2.4 MOC1.2 P1.3 pc1.3 Program.1 Q1.2 R7.1 R15.1 R24.1 ST1.1 ST2.1 ST3.1 ST4.1 U1.1 U1.2 U1.3 U1.4 U1.7 U2.13 U2.21 U2.22 VR1.1 Zener1.1 | length 33.5
  Bottom Layer w0.35: C6.1@15.977,3.478 16.61,3.908 16.745,4.231 17.063,4.726 17.261,4.924 19.185,4.924 19.33,4.924 19.535,5.13 19.535,5.419 19.458,7.415 19.253,7.62 ; IC1.32 18.495,7.825 18.7,7.62 19.253,7.62 ; C5.1 24.462,22.379 24.095,22.012 IC1.16 24.07,17.809 24.07,16.9 23.566,16.396 22.775,16.396 20.665,14.286 v1(20.549,14.286) 20.544,14.28 20.544,13.384 20.538,13.379 20.538,12.407 v1(20.549,12.396) 19.922,11.769 19.922,11.731 19.295,11.104 IC1.31 19.295,7.662 19.253,7.62
  Bottom Layer w0.5: C15.2 37.381,6.24 38.669,6.24 Zener1.1
  other v1: 20.168,-17.221 19.914,-9.474 -0.254,-7.722 27.584,-7.344 16.256,-4.826 24.003,-4.826 31.013,-4.826 35.686,-4.547 11.77,-4.166 1.727,-3.861 32.893,-3.683 -1.88,-3.658 0.66,-2.362 45.009,-1.93 43.485,0 19.1,0.756 16.753,1.42 0.66,2.642 7.62,4.039 9.195,7.62 26.873,8.28 3.353,9.195 12.372,9.902 21.638,12.401 20.538,13.341 21.627,13.346 21.638,14.292 29.321,14.416 8.966,17.932 11.466,17.932 12.878,17.932 28.194,17.932 8.966,19.406 -2.057,20.32 2.616,21.082 4.623,21.082 -2.057,21.869 34.123,25.611 30.988,26.111 16.193,26.391 34.123,28.546 41.927,29.159 32.528,30.455 41.859,30.455 1.041,30.561 -3.378,30.734 36.881,31.725 41.927,31.725 41.927,32.995 1.041,34.163 44.171,35.458 -5.123,36.551 34.245,41.478 0.864,42.723 3.073,42.723 5.563,42.723 8.153,42.723 11.466,42.723
INPUT: C3.2 D1.1 IC1.7 R5.2 R7.2 | length 24.5
  Bottom Layer w0.381: R5.2 7.082,25.42 8.26,25.42 8.894,24.786 8.894,21.492 10.3,20.086 13.565,20.086 15.533,18.117 15.533,15.645 15.583,15.596 IC1.7
  Bottom Layer w0.5: R7.2 2.727,27.543 4.893,27.543 D1.1 5.004,25.454 4.904,25.354 7.149,25.354 R5.2 ; C3.2 C3.2@4.725,25.354
L: D12.1 D15.2 in2.1 in3.2 R18.1 | length 59
  Top Layer w0.381: 10.668,-32.08 15.189,-32.08
  Top Layer w0.5: in2.1@22.962,-39.853 in2.1@24.943,-39.827
  Top Layer w1.27: R18.1 10.668,-32.08 ; 15.189,-32.08 in2.1@22.962,-39.853
  Bottom Layer w0.5: D15.2@17.397,-14.455 D15.2
  Bottom Layer w1: R18.1 12.751,-32.08 18.554,-26.277 18.554,-17.667 17.476,-16.589 D15.2 ; D12.1 D15.2@17.397,-14.455
  Bottom Layer w4: in2.1@24.943,-39.827 28.219,-39.853 in3.2
LCD-DN: "NOKIA 1.5" IC1.13 | length 23.9
  Top Layer w0.254: v1(11.466,29.193) 11.466,29.305 12.057,29.896 12.057,34.325
  Bottom Layer w0.4: v1(11.466,29.193) 11.466,28.314 12.39,27.39 12.39,27.009 12.375,26.995 12.375,25.115 13.614,23.876 15.941,23.876 18.608,21.209 21.295,21.209 21.695,20.809 IC1.13
LCD-RST: "NOKIA 1.2" IC1.11 | length 24.7
  Top Layer w0.254: v1(8.894,28.654) 8.894,30.01 9.445,30.561 10.008,30.561 10.284,30.837 10.284,34.325
  Bottom Layer w0.4: v1(8.894,28.654) 8.973,28.575 8.973,28.247 10.975,26.245 10.975,23.696 12.372,22.299 15.166,22.299 17.831,19.634 18.059,19.406 19.861,19.406 20.095,19.171 IC1.11
LCD-SCE: "NOKIA 1.3" IC1.12 | length 24.2
  Top Layer w0.254: v1(10.008,29.193) 10.875,30.06 10.875,34.325
  Bottom Layer w0.4: v1(10.008,29.193) 10.008,28.546 11.675,26.879 11.675,24.389 13.052,23.012 15.533,23.012 18.226,20.32 20.661,20.32 20.895,20.086 IC1.12
LCD-SCLK: "NOKIA 1.6" IC1.14 | length 23.9
  Top Layer w0.254: 12.648,34.325 12.648,29.672 13.36,28.959 13.36,28.233 v1(13.296,28.169)
  Bottom Layer w0.381: v1(13.296,28.169) 13.31,28.155 13.31,25.458 14.028,24.74 16.054,24.74 18.721,22.073 22.149,22.073 22.174,22.098 22.495,21.777 IC1.14
n: C20.2 D13.2 D14.1 in3.1 R19.1 tri1.2 VR2.2 | length 70.8
  Top Layer w1.27: v1(8.755,-15.697) v2(8.755,-16.815) 8.755,-21.811 12.395,-25.451 25.857,-25.451 29.464,-21.844 C20.2 35.255,-21.844 36.035,-21.064 ; VR2.2 36.035,-21.064 ; R19.1 36.805,-15.925 36.035,-16.695 36.035,-21.064
  Bottom Layer w0.5: D13.2 7.24,-14.299 8.611,-14.299 ; v2(8.755,-16.815) v1(8.755,-15.697) 8.696,-15.637 8.696,-14.384 8.611,-14.299 ; D14.1 8.611,-14.299 ; C20.2@30.709,-21.278 C20.2@30.709,-21.234 ; VR2.2 VR2.2@36.035,-26.605
  Bottom Layer w4: in3.1 35.458,-31.999 tri1.2 35.311,-27.623 VR2.2
NetBuzzer1_1: Buzzer1.1 R1.2 | length 6.2
  Bottom Layer w0.5: Buzzer1.1 41.927,15.076 R1.2
NetBuzzer1_2: Buzzer1.2 Q1.3 | length 12.6
  Bottom Layer w0.5: Q1.3 29.752,6.484 29.802,6.534 29.802,6.884 33.325,10.406 Buzzer1.2
NetC2_1: C2.1 P1.1 R2.2 | length 7.3
  Bottom Layer w1: P1.1 -1.551,28.499 -0.4,29.65 R2.2
NetC9_2: C9.2 R13.1 R14.2 | length 10.3
  Bottom Layer w0.508: R13.1@8.755,-4.724 9.053,-4.427 C9.2 9.309,1.105 9.635,1.431 9.635,2.311 10.873,2.311 11.17,2.609 11.17,3.242 11.401,3.473 R14.2
NetC11_2: C11.2 D3.2 D5.2 R13.2 R15.2 | length 16.5
  Bottom Layer w0.35: C11.2 -4.04,-7.821 -2.87,-8.992 3.224,-8.992 3.429,-8.787 D3.2 3.429,-5.746 3.741,-5.435 R15.2 R13.2
NetC12_1: C12.1 R18.2 | length 11
  Bottom Layer w0.5: C12.1 -3.81,-41.276 -3.329,-40.795 ; -2.439,-32.487 -2.403,-32.487 -1.871,-31.955 -1.871,-31.919 -1.635,-31.919 -1.635,-32.071 R18.2
  Bottom Layer w1: -3.329,-40.795 -3.329,-33.377 -2.439,-32.487
NetC12_2: C12.2 D7.1 D10.2 | length 58.6
  Bottom Layer w0.5: D7.1 40.211,-6.477 D10.2
  Bottom Layer w1: C12.2@19.812,-42.103 19.812,-27.457 21.695,-25.574 21.695,-16.481 26.492,-11.684 42.697,-11.684 43.713,-10.668 43.713,-6.579 D10.2
NetC15_1: C15.1 D7.2 D8.2 R17.1 | length 16.9
  Bottom Layer w0.5: C15.1 32.703,3.771 32.703,3.416 33.782,2.337 38.888,2.337 39.345,2.794 R17.1 39.751,-1.546 D7.2@40.052,-1.847 ; D8.2 D7.2@40.052,-1.847 ; D7.2 D7.2@40.052,-1.847
NetC20_1: C20.1 R28.1 R29.1 | length 6.6
  Bottom Layer w0.5: C20.1 C20.1@25.781,-21.599
  Bottom Layer w0.8: R28.1 24.13,-23.495 C20.1 ; C20.1@25.781,-21.599 26.753,-20.627 R29.1
NetD3_1: D3.1 D4.2 L1.1 | length 25.5
  Bottom Layer w0.35: D3.1 3.416,-10.934 1.003,-10.934 D4.2 0.716,-10.946 0.341,-11.321 0.341,-11.596 -0.025,-11.962 -0.025,-17.21 1.23,-18.466 12.771,-18.466 L1.1@14.57,-20.265 ; L1.1@14.978,-20.739 L1.1@15.232,-20.993
NetD5_1: D5.1 D6.2 L1.2 | length 14.3
  Bottom Layer w0.35: D5.1 -1.224,-10.946 -0.849,-11.321 -0.849,-11.596 -0.686,-11.759 -0.686,-18.016 L1.2
NetD8_1: D8.1 D9.2 R20.2 | length 6.4
  Bottom Layer w0.5: D9.2 35.343,-6.47 ; R20.2 35.509,-6.636 35.343,-6.47 ; D8.1 36.906,-6.47 35.343,-6.47
NetD11_2: D11.2 R23.1 | length 3.4
  Bottom Layer w0.381: R23.1 25.885,26.314 D11.2
NetD12_2: D12.2 D14.2 pc1.2 | length 16.7
  Bottom Layer w0.5: D14.2 D12.2 ; pc1.2 14.295,0.584 15.087,-0.209 15.087,-7.722
  Bottom Layer w0.508: D12.2 15.087,-8.055 15.087,-7.722
NetD13_1: D13.1 D15.1 R26.2 | length 21
  Bottom Layer w0.35: R26.2@10.224,-6.684 10.534,-6.374 R26.2 ; D15.1@17.069,-9.5 16.61,-9.5 16.687,-9.422 D15.1 D15.1@17.45,-10.058
  Bottom Layer w0.5: R26.2@10.224,-6.684 9.572,-6.684 7.138,-9.118 D13.1 7.138,-11.253 7.722,-11.836 16.892,-11.836 17.45,-11.278 D15.1@17.45,-10.058
Netin2_2: in2.2 R28.2 tri1.1 VR2.1 | length 15.8
  Bottom Layer w0.5: 27.234,-27.762 28.098,-26.899 VR2.1
  Bottom Layer w0.8: R28.2@24.289,-27.762 27.234,-27.762
  Bottom Layer w4: in2.2 29.405,-32.233 tri1.1 28.389,-30.455 VR2.1
NetMOC1_1: MOC1.1 R27.1 | length 4.4
  Bottom Layer w1: R27.1 24.039,-7.989 25.044,-8.995 MOC1.1
NetMOC1_4: MOC1.4 tri1.3 | length 19.9
  Bottom Layer w1: MOC1.4 30.124,-16.852 30.402,-17.13 31.074,-17.13 40.836,-26.891 tri1.3
NetMOC1_6: MOC1.6 R29.2 | length 2.3
  Bottom Layer w0.8: R29.2@23.931,-18.636 23.931,-17.929 MOC1.6
"NetNOKIA 1_11": "NOKIA 1.11" R16.2 | length 14.9
  Top Layer w0.35: 15.602,34.325 15.602,28.128 15.404,27.929 15.404,24.3 16.14,23.564 17.32,23.564 17.428,23.672 v1(18.732,23.672)
  Bottom Layer w0.35: v1(18.732,23.672) R16.2
Netpc1_1: pc1.1 R26.1 | length 4.9
  Bottom Layer w0.3: pc1.1 12.04,-1.956 pc1.1@12.243,-2.159 ; R26.1 13.494,-5.105
  Bottom Layer w0.5: pc1.1@12.243,-2.159 13.494,-3.41 13.494,-5.105
NetQ1_1: Q1.1 R3.2 | length 7.9
  Bottom Layer w0.3: Q1.1 26.119,5.534 25.508,6.145 25.508,8.619 26.738,9.848 R3.2
NetR19_2: R19.2 R20.1 | length 5.9
  Top Layer w0.5: R20.1 R20.1@35.686,-13.513 ; R19.2@39.674,-9.525 R19.2
  Top Layer w0.762: R20.1@35.686,-13.513 R19.2@39.674,-9.525
NetR21_1: R21.1 U2.2 | length 16.6
  Bottom Layer w0.35: R21.1 1.981,40.462 2.642,39.802 15.583,39.802 16.245,40.464 U2.2
NetR22_1: R22.1 U2.1 | length 11.3
  Bottom Layer w0.35: R22.1 4.901,41.282 5.721,40.462 14.215,40.462 14.42,40.667 14.42,41.153 U2.1
NetR23_2: R23.2 U2.31 | length 2.6
  Bottom Layer w0.381: U2.31 19.245,27.039 19.59,26.694 R23.2
NetR24_2: R24.2 U2.34 | length 2.6
  Bottom Layer w0.381: R24.2 14.621,26.439 14.621,28.654 U2.34
RESET: 1k.1 C8.2 IC1.4 | length 5.4
  Bottom Layer w0.3: 1k.1 13.614,13.196 13.614,13.321 13.739,13.196 IC1.4
rx: IC1.9 R22.2 | length 29.3
  Bottom Layer w0.35: R22.2 4.521,37.421 4.726,37.216 5.994,37.216 7.469,35.741 7.469,28.442 10.3,25.611 10.3,22.974 11.836,21.438 14.621,21.438 17.457,18.602 17.457,17.834 IC1.9
SCL: IC1.18 R4.2 U1.6 | length 24.3
  Bottom Layer w0.4: IC1.18 27.483,15.596 29.175,17.288 29.175,22.874 32.995,26.694 R4.2@36.068,26.694 ; R4.2 R4.2@36.068,26.694 ; U1.6@38.557,30.531 36.881,30.531 36.068,29.718 R4.2@36.068,26.694
SDA: IC1.19 R6.2 U1.5 | length 24.9
  Bottom Layer w0.4: IC1.19 27.846,14.796 29.875,16.824 29.875,22.125 32.312,24.562 R6.2 37.47,28.765 37.852,29.146 38.912,29.146 U1.5
Sens: C4.2 P1.2 R5.1 | length 11.9
  Bottom Layer w0.5: P1.2 -1.253,25.959 -0.646,25.351 C4.2 2.261,25.072 2.261,24.169 2.553,23.876 6.754,23.876 7.047,23.583 R5.1
sw1: IC1.30 R8.1 ST1.2 | length 30.2
  Top Layer w0.3: ST1.2@0.037,0 7.784,0 7.784,2.263 7.959,2.438 18.475,2.438 v1(19.594,3.557)
  Bottom Layer w0.3: R8.1 19.594,3.549 20.034,3.549 20.122,3.637 20.21,3.725 20.21,7.731 20.095,7.845 IC1.30
SW2: IC1.27 R9.1 ST2.2 | length 38.3
  Top Layer w0.5: ST2.2@16.43,-17.264 16.43,-7.344 16.967,-6.807 25.171,-6.807 25.808,-6.17 v1(25.808,1.42)
  Bottom Layer w0.5: IC1.27 22.495,3.978 24.903,1.571 25.658,1.571 25.959,1.27 R9.1@25.959,0.268
sw3: IC1.25 R10.1 ST3.2 | length 23.5
  Top Layer w0.5: v1(29.979,2.126) 29.979,0.35 29.629,0 29.514,0 ST3.2@37.261,0
  Bottom Layer w0.5: IC1.25 24.095,5.42 26.187,3.327 28.778,3.327 v1(29.979,2.126) 30.778,1.328 R10.1@30.778,0.258
SW4: IC1.26 R11.1 ST4.2 | length 28
  Top Layer w0.3: ST4.2@14.757,0 15.207,-0.45 15.774,-0.45 15.783,-0.459 21.645,-0.459 22.104,0 22.504,0 22.723,0.219 22.723,0.874 24.922,3.073 26.772,3.073 v1(28.194,1.651)
  Bottom Layer w0.381: IC1.26 23.295,7.62 23.295,4.619 25.603,2.311 27.504,2.311 28.245,1.571 R11.1@28.245,0.584
TCK: IC1.24 Program.3 | length 27.6
  Bottom Layer w0.381: IC1.24 30.542,10.796 31.566,11.82 31.566,20.897 33.048,22.379 42.473,22.379 Program.3@42.829,22.736
TMS: IC1.23 Program.4 | length 29.4
  Bottom Layer w0.381: IC1.23 30.166,11.596 30.778,12.208 30.778,21.31 32.528,23.06 41.636,23.06 41.859,23.283 41.859,24.821 42.082,25.044 Program.4@43.143,25.044
triakPulse: IC1.29 R27.2 | length 17
  Bottom Layer w0.3: R27.2@20.661,-5.029 18.237,-2.606 18.237,1.628 18.413,1.803 19.357,1.803 20.895,3.342 IC1.29
tx: IC1.8 R21.2 | length 31.3
  Bottom Layer w0.381: R21.2 2.261,38.042 2.261,37.363 3.073,36.551 5.638,36.551 6.658,35.53 6.658,28.312 9.635,25.335 9.635,22.302 11.17,20.767 14.017,20.767 16.667,18.117 16.667,17.683 17.057,17.292 IC1.8
VCC-3.3v: 1k.2 "NOKIA 1.7" "NOKIA 1.8" C1.2 C5.2 C6.2 C7.2 C13.1 C14.2 D1.2 D2.2 IC1.1 IC1.5 IC1.17 Program.2 R4.1 R6.1 R8.2 R9.2 R10.2 R11.2 R25.2 U1.8 U2.12 VR1.2 VR1.4 | length 194.4
  Top Layer w0.229: v1(5.029,31.852) 5.029,29.083 6.959,27.153 14.384,27.153 ; 13.238,34.325 13.237,34.323 13.237,31.064 13.829,30.472 13.829,34.325
  Top Layer w0.5: 27.457,21.666 27.457,39.091 v3(31.267,42.901)
  Top Layer w0.508: 40.488,23.851 40.488,20.491 40.785,20.193 Program.2@43.226,20.193 ; v1(40.488,26.391) v1(40.488,27.229)
  Top Layer w0.762: C13.1 12.497,15.621 ; 13.829,30.472 14.384,29.918 14.384,27.153 14.384,21.666 ; v1(18.771,11.769) 18.771,11.783 18.821,11.833 v1(18.821,13.996) 17.196,15.621 ; v1(23.566,15.338) 23.557,15.348 22.019,15.348 21.746,15.621 17.196,15.621 ; v1(40.488,26.391) 40.488,23.851 38.303,21.666 27.457,21.666 14.384,21.666 ; 12.497,15.621 14.384,17.508 14.384,21.666 ; 12.497,15.621 17.196,15.621
  Bottom Layer w0.229: D1.2 5.029,30.758 v1(5.029,31.852) 5.029,34.11 C7.2
  Bottom Layer w0.35: 1k.2 13.924,8.812 14.883,8.812 15.697,9.626 ; C6.2@15.697,6.343 15.697,9.626 ; IC1.5 v1(18.821,13.996) ; v1(18.771,11.769) 18.771,11.499 18.093,10.821 17.082,10.821 IC1.1 15.902,10.796 15.697,10.591 15.697,9.626 ; v1@23.566,15.316 v1(23.566,15.338) 24.599,16.371 25.508,16.371 IC1.17 25.536,16.399 26.745,16.399 27.302,16.957 27.302,19.102 C5.2
  Bottom Layer w0.5: U2.12 31.245,42.861 v3@31.267,42.884
  Bottom Layer w0.508: U1.8 40.894,32.995 ; R4.1 39.097,26.352 39.201,26.248 v1@40.437,26.248 ; C14.2 39.851,35.001 40.894,33.958 40.894,32.995 ; R6.1 40.437,24.568 v1@40.437,26.248 ; v1@40.437,26.248 40.437,28.702 40.894,29.159 40.894,32.995
  Bottom Layer w0.762: C13.1 -1.88,15.367 -0.127,15.367 1.016,14.224 VR1.4 ; C1.2 4.723,16.302 3.094,14.674 VR1.4 ; VR1.2 VR1.4 ; 1k.2 13.626,8.49 13.626,6.615 D2.2 ; C6.2@16.245,6.428 16.285,6.468 18.339,6.468 R8.2@18.379,6.508 ; R25.2@23.8,-2.579 24.18,-2.579 24.303,-2.702 R10.2@30.778,-2.702
  other v1: -0.93,15.621
VCC_5V: C18.2 C19.1 IC2.3 R2.1 VR1.3 | length 50.2
  Top Layer w1: C19.1 -2.052,9.902 v1(-0.542,9.902)
  Bottom Layer w0.635: -4.445,9.677 -4.623,9.855 -4.623,34.271 -4.251,34.643 -3.527,34.643 -3.36,34.811 R2.1
  Bottom Layer w1: -4.445,9.677 -2.277,9.677 C19.1 -2.052,9.902 v1(-0.542,9.902) -0.295,9.902 1.132,11.328 6.422,11.328 7.017,11.924 9.068,11.924 C18.2 7.062,9.095 6.476,8.509 IC2.3
ZeroCross: IC1.28 pc1.4 R25.1 | length 14.5
  Bottom Layer w0.5: pc1.4 21.344,-1.544 22.818,-1.544 23.8,-0.562 23.8,0.381 23.42,0.381 23.185,0.616 23.185,1.606 21.695,3.095 IC1.28
pads on no net: D1.0 D2.0 D3.0 D4.0 D5.0 D6.0 IC1.2 IC1.3 IC1.20 IC1.22 MOC1.3 MOC1.5 U2.3 U2.4 U2.5 U2.6 U2.7 U2.8 U2.9 U2.10 U2.11 U2.14 U2.15 U2.16 U2.17 U2.18 U2.19 U2.20 U2.23 U2.24 U2.25 U2.26 U2.27 U2.28 U2.29 U2.30 U2.32 U2.33

## Polygon pours and split planes (outlines as drawn)
GND on Bottom Layer "NONET_L-01_P-001" (solid, remove dead copper, pour order 0): 45.517,-4.115 45.466,-4.166 31.566,-4.166 31.566,-9.956 30.854,-10.668 20,-10.668 19.535,-10.202 19.535,-6.25 18.339,-5.055 16.745,-5.055 16.745,0.756 15.374,2.126 10.992,2.126 10.008,1.142 10.008,-3.748 9.068,-4.688 9.068,-5.622 8.316,-6.374 5.437,-6.374 4.928,-6.883 4.928,-16.891 5.965,-17.929 15.903,-17.929 17.245,-19.271 17.245,-24.03 15.35,-25.925 0.627,-25.925 -0.229,-25.07 -0.025,-24.867 -0.025,-18.683 -1.64,-17.069 -5.41,-17.069 -5.918,-16.561 -5.918,43.51 -6.02,43.612 -5.994,43.637 45.847,43.637
GND on Top Layer "NONET_L-01_P-001" (solid, remove dead copper, pour order 1): 45.898,43.688 45.898,-6.147 45.237,-6.807 33.985,-6.807 31.953,-8.839 31.953,-13.327 31.758,-13.327 31.013,-14.072 24.003,-14.072 22.809,-15.265 22.809,-19.71 16.256,-19.71 12.548,-16.002 12.548,-14.427 11.659,-13.538 -4.166,-13.538 -5.715,-11.989 -5.715,43.637 -5.664,43.688 45.72,43.688

## Keep-outs
Keep-Out Layer:
  lines w0.254: -6.02,-43.967 -6.02,43.561 45.695,43.561 45.796,43.459 45.796,-43.967 -6.02,-43.967

## Other copper
Top Layer:
  rectangle net VCC-3.3v: 13.073,29.907 14.002,37.49
Bottom Layer:
  rectangle net GND: 2.116,-3.658 6.476,3.503
  rectangle net GND: 1.016,-2.702 7.366,2.572

## Silkscreen, mask and mechanical layers (free items; w line width, h text height)
Bottom Overlay:
  drawing of 7 lines, arcs and shapes, not listed
  text "Serial : AR-L0202" at 34.577,41.642 h1
  text "+" at -0.062,37.084 h1 r270
  text "Don't Touch" at 56.218,-27.381 h1

## Text inside footprints (layer, text, board x,y; h text height)
Buzzer1: Bottom Overlay "+" at 39.547,12.484 h1 r315